# EAGLE board Balloon_Cut-Down_Paste_Mask (EAGLE 9.1.3)

Size 33.02 x 92.71 mm. Coordinates in mm from the lower left corner, seen from the top.
Outline: 0,92.71 33.02,92.71 33.02,0 0,0 0,92.71
Copper layers (1*16): Top 0.018mm / dielectric 1.55mm / Bottom 0.018mm
Design rules "Multi-CB_2L_100um-Tracks_OL35um *": minimum track width 0.1mm, minimum drill 0.2mm, track to track 0.1mm, track to pad 0.1mm, pad to pad 0.1mm, via to via 0.1mm, smd to smd 0mil, copper to edge 0.2mm, drill to drill 0.2mm, minimum pad ring 0.125mm, minimum via ring 0.1mm, stop-mask expansion 2mil, vias tented up to drill 0.45mm, thermal gap 0.2mm
Net classes: 2 gnd: width 0.254 mm, drill 0.254 mm, clearance 0.178 mm; 3 usbvcc: width 0.203 mm, drill 0.406 mm, clearance 0.178 mm

## Footprints (pad centres in the part's own frame; a part is rotated, then mirrored left to right if it is on the bottom)
0805-NO = smd 1.24 x 1.5: 1 -0.95,0; 2 0.95,0
0603-NO = smd 1.1 x 1: 1 -0.85,0; 2 0.85,0
C0805 = smd 1.3 x 1.5: 1 -0.95,0; 2 0.95,0
SOD-123 = smd 1.4 x 1.4: A 1.85,0; C -1.85,0
FIDUCIAL-1X2 = smd 1 x 1: 1 0,0
ERIC4 = smd 1.15 x 1.15: 1 -7.62,-7.62; 2 -5.08,-7.62; 3 -2.54,-7.62; 4 0,-7.62; 5 2.54,-7.62; 6 5.08,-7.62; 7 7.62,-7.62; 8 10.16,-5.08; 9 10.16,-2.54; 10 10.16,0; 11 10.16,2.54; 12 10.16,5.08; 13 7.62,7.62; 14 5.08,7.62; 15 2.54,7.62; 16 0,7.62; 17 -2.54,7.62; 18 -5.08,7.62; 19 -7.62,7.62; 20 -10.16,5.08; 21 -10.16,2.54; 22 -10.16,0; 23 -10.16,-2.54; 24 -10.16,-5.08
SOT95P237X112-3N = smd 0.559 x 1.27: 1 -0.94,-1.041; 2 0.94,-1.041; 3 0,1.041
CAM-M8 = smd 0.7 x 1.5: 1 -6.2,-4.4; 2 -5.2,-4.4; 3 -4.2,-4.4; 4 -3.2,-4.4; 5 -2.2,-4.4; 6 -1.2,-4.4; 7 -0.2,-4.4; 8 0.8,-4.4; 9 1.8,-4.4; 10 2.8,-4.4; 11 3.8,-4.4; 12 4.8,-4.4; 15 4.8,4.4; 16 3.8,4.4; 17 2.8,4.4; 18 1.8,4.4; 19 0.8,4.4; 20 -0.2,4.4; 21 -1.2,4.4; 22 -2.2,4.4; 23 -3.2,4.4; 24 -4.2,4.4; 25 -5.2,4.4; 26 -6.2,4.4 | smd 1 x 1.5: 13 5.95,-4.4; 14 5.95,4.4 | smd 1.5 x 0.7: 27 -6.6,2; 28 -6.6,1; 29 -6.6,0; 30 -6.6,-1; 31 -6.6,-2
SOT23-5 = smd 0.55 x 1.2: 1 -0.95,-1.3; 2 0,-1.3; 3 0.95,-1.3; 4 0.95,1.3; 5 -0.95,1.3
QFN-20 = smd 0.7 x 0.25: 1 -1.45,1.55; 4 -1.45,-0.4; 5 -1.45,-1.25; 6 -1.45,-2.1; 7 1.45,-2.1; 8 1.45,-1.25; 9 1.45,-0.4; 12 1.45,1.55 | smd 1.1 x 0.25: 2 -1.25,0.9; 3 -1.25,0.25; 10 1.25,0.25; 11 1.25,0.9 | smd 0.25 x 0.7: 13 1.25,2.45; 14 0.75,2.45; 17 -0.75,2.45; 18 -1.25,2.45 | smd 0.25 x 1.1: 15 0.25,2.25; 16 -0.25,2.25 | smd 0.6 x 1.95: 19 -1,-1.25; 20 1,-1.25
SOT23-5' = smd 0.69 x 0.99: 1 -0.95,-1.29; 2 0,-1.29; 3 0.95,-1.29; 4 0.95,1.3; 5 -0.95,1.3
CHIPLED_0805_NOOUTLINE = smd 1.2 x 1.2: A 0,-1.05; C 0,1.05
SOT23-WIDE = smd 1 x 1.2: 1 -0.95,-1; 2 0.95,-1; 3 0,1
R0603 = smd 1 x 1.1: 1 -0.85,0; 2 0.85,0
R0805 = smd 1.3 x 1.5: 1 -0.95,0; 2 0.95,0

## Placement (x,y rotation side)
C1  10µF  [0805-NO]  13.08,49.43 270 top
C2  10µF  [0805-NO]  20.16,49.5 270 top
C3  100nF  [0603-NO]  22.99,49.47 270 top
C4  10uF  [C0805]  11.62,68.39 0 top
C5  10uF  [C0805]  13.4,63.25 90 top
C6  10nF  [C0805]  7.68,48.83 0 top
C7  0.1uF  [0805-NO]  28.16,63.47 0 top
C8  10nF  [C0805]  24.8,9.53 180 top
C9  10nF  [C0805]  23.53,31.75 180 top
C10  10nF  [C0805]  1.91,22.26 270 top
C11  10nF  [C0805]  1.91,27.27 90 top
D1  MBR120  [SOD-123]  16.41,55.91 90 top
D2  MBR120  [SOD-123]  22.23,55.88 90 top
D3  MBR120  [SOD-123]  10.79,74.3 90 top
FD1  FIDUCIAL1X2  [FIDUCIAL-1X2]  1.87,9.53 0 top
FD2  FIDUCIAL1X2  [FIDUCIAL-1X2]  31.08,83.82 0 top
IC1  ERIC9-FCC  [ERIC4]  12.7,34.92 90 top
IC2  MCP111T-240E/TT  [SOT95P237X112-3N]  28.57,54.61 0 top
IC3  CAM-M8  [CAM-M8]  25.4,71.12 0 top
IC4  SPX3819-3.3  [SOT23-5]  16.54,49.56 270 top
IC5  MPM3610  [QFN-20]  9.56,64.14 0 top
IC6  74AHCT1G125DBV  [SOT23-5']  7.62,53.31 0 top
LED1  RED  [CHIPLED_0805_NOOUTLINE]  1.91,38.73 0 top
Q1  DMG3415U-7  [SOT23-WIDE]  23.78,62.99 270 top
R1  1K  [0603-NO]  1.87,34.29 90 top
R2  330K  [R0603]  19.02,54.93 270 top
R3  100K  [R0603]  18.99,59.25 270 top
R4  100K_1%  [R0805]  5.3,63.12 270 top
R5  19K1_0.1%  [R0805]  5.3,67.12 270 top
R6  68k  [R0805]  7.59,69.34 270 top
R7  1K  [0603-NO]  23.5,34.92 180 top
R8  1K  [0603-NO]  23.5,38.73 180 top
R9  100K  [R0603]  20.38,63.06 90 top

## Library data of the parts
C1-C3 C7 D1-D3 IC4 LED1 Q1 R1 R7 R8 = microbuilder
C4-C6 C8-C11 = rcl; SPICEPREFIX: C
FD1 FD2 = SparkFun-Aesthetics
IC1 = SamacSys_Parts; ARROW_PART_NUMBER: eRIC9-FCC; DESCRIPTION: RF Modules Euro/US 868/915MHz Int Cont Trans RFMod; HEIGHT: mm; MANUFACTURER_NAME: LPRS; MANUFACTURER_PART_NUMBER: eRIC9-FCC
IC2 = Microchip-MCP11; MPN: MCP111T-240E/TT; OC_FARNELL: 1851877; OC_NEWARK: 56J7328; PACKAGE: SOT23-3; SUPPLIER: MICROCHIP
IC3 = ubloxLib
IC5 = IntegratedCircuits; CASE: QFN-20; PART_NUMBER: MPM3610GQV-P; TYPE: Circuito_Integrato
IC6 = 74xx-little-us
R2-R6 R9 = rcl; SPICEPREFIX: R

## Nets
GND: IC4.2 IC6.3
GND$1: IC3.4
GND$2: IC3.5
GND$3: IC3.10
GND$4: IC3.11
GND$5: IC3.12
GND$6: IC3.13
GND$7: IC3.14
GND$8: IC3.15
GND$9: IC3.18
GND$10: IC3.19
GND$11: IC3.21
GND$12: IC3.22
GND$13: IC3.27
GND$14: IC3.31
IN: IC4.1
V_BCKP: IC3.8
VCC: IC3.9 IC6.5
VCC_IO: IC3.1
VDD: IC2.3
VSS: IC2.2

## Tracks (layer width: path | path; a pad name or v marks a point on that pad's centre or on a via)
GND  (1 unrouted)
VCC  (1 unrouted)